# Altium PCB Booster_PA_PREAMP.PcbDoc (part 1 of 2)
Units mil, origin at the board's own origin, x right, y up, seen from the top; angles counter-clockwise.
Board outline 3139.79 x 1141.76 mil, 2 copper layers (Top Layer, Bottom Layer), stack 42.17 mil thick; 86 components, 52 nets, 234 pads, 243 vias.
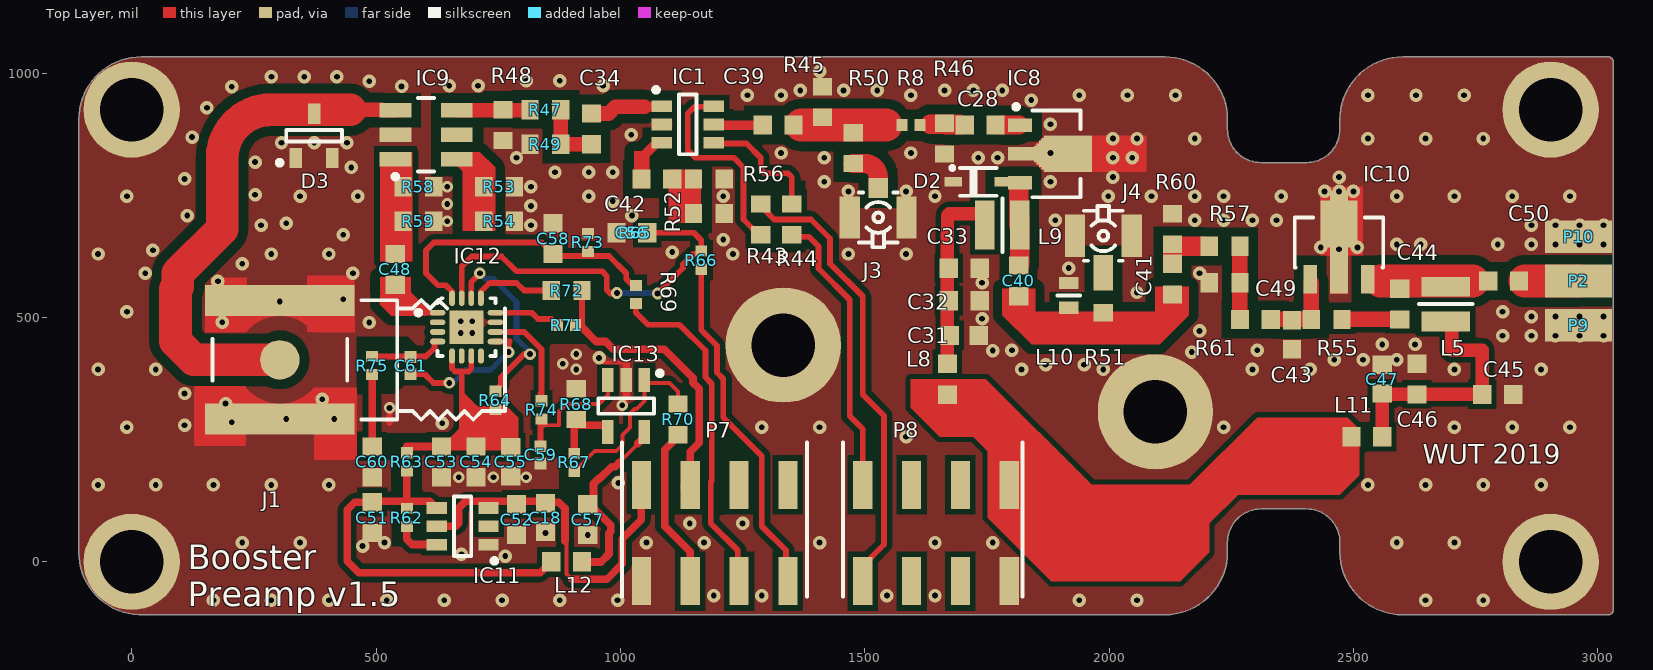
[diagram p0: Top Layer view]
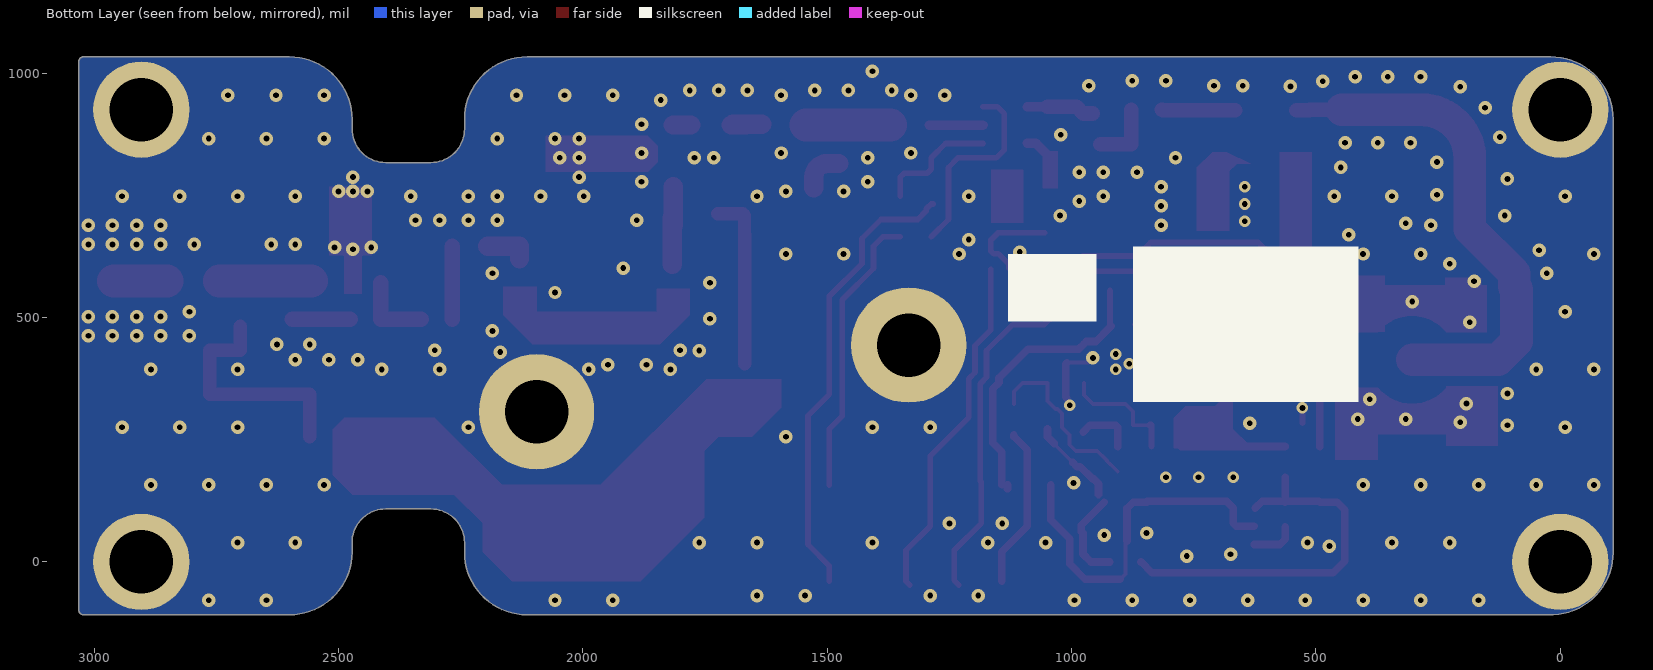
[diagram p1: Bottom Layer view, seen from below]
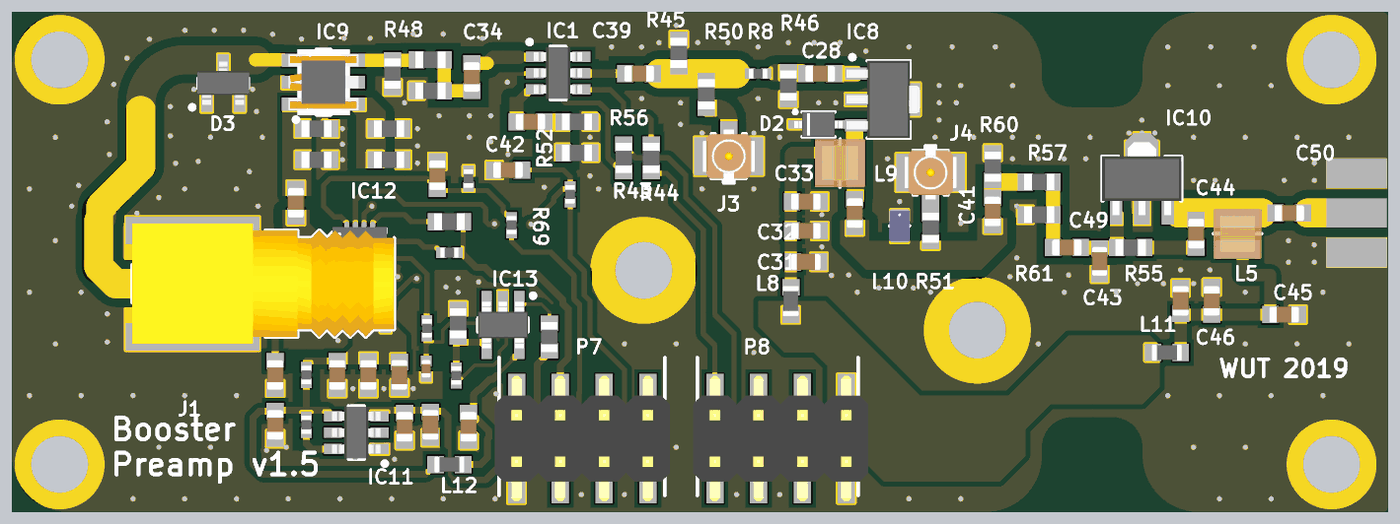
[diagram p2: 3D render of the assembled board from above, using the file's embedded part models]

## Layer stack, top to bottom
Top Solder: solder mask 0.4, Solder Resist, Dk 3.5
Top Layer: signal copper 1.4
Dielectric 1: dielectric 39.3701, FR408, Dk 3.67
Bottom Layer: signal copper 1.4
Bottom Solder: solder mask 0.4, Solder Resist, Dk 3.5

## Board outline
14.24,-108.17 ccw(c15.75,-98.43) 15.75,-108.28 2114.17,-108.28 ccw(c2114.17,19.68) 2242.14,19.68 2242.14,39.37 ccw(c2232.28,39.37) 2242.14,39.41 cw(c2311.02,39.37) 2311.02,108.25 2403.54,108.25 cw(c2403.54,39.37) 2472.43,39.37 2472.43,19.68 cw(c2482.28,19.68) 2472.43,19.73 2472.43,19.68 ccw(c2600.39,19.68) 2600.39,-108.28 2903.54,-108.28 ccw(c2903.54,-98.43) 2903.59,-108.28 3021.65,-108.28 ccw(c3021.65,-98.43) 3031.51,-98.43 3031.51,1023.62 ccw(c3021.65,1023.62) 3021.65,1033.48 2600.39,1033.48 ccw(c2600.39,905.51) 2472.43,905.51 ccw(c2482.28,905.51) 2472.43,905.47 2472.43,885.83 cw(c2403.54,885.83) 2403.54,816.94 2311.02,816.94 cw(c2311.02,885.83) 2242.14,885.79 ccw(c2232.28,885.83) 2242.14,885.83 2242.14,905.51 ccw(c2114.17,905.51) 2114.17,1033.48 19.68,1033.48 ccw(c19.68,905.51) -108.28,905.51 -108.28,19.68 ccw(c19.68,19.68)

## Design rules (kind name [scope] priority, off if disabled: settings)
AcuteAngle [All] p1: minimum=6.00000000000000E+0001 checktracksonly=FALSE
Clearance Clearance_50_Ohm [InNetClass('50_Ohm') vs InNet('GND')] p1: gap=19.68 ignorepadtopadclearanceinfootprint=FALSE except(6: Arc-SMDPad Track-SMDPad SMDPad-SMDPad)
Clearance [All] p2: gap=6 ignorepadtopadclearanceinfootprint=FALSE except(11: Arc-Poly Track-Poly SMDPad-Poly THPad-Poly Via-Poly Fill-Fill Fill-Poly Fill-Region Fill-Text Fill-Hole Poly-Poly Poly-Region Poly-Text Poly-Hole Region-Region Region-Text Region-Hole)
HoleSize [All] p1: absolutevalues=TRUE maxlimit=200 minlimit=5 maxpercent=80.000 minpercent=20.000
MinimumSolderMaskSliver [All] p1: minsoldermaskwidth=3.94
PolygonConnect [All] p1: connectstyle=Direct reliefconductorwidth=10 reliefentries=4 polygonreliefangle="90 Angle" airgapwidth=10
RoomDefinition Booster_PA_PREAMP [InComponentClass('Booster_PA_PREAMP')] p1 off: confinementstyle=ConfineIn formatcopy=TRUE lockcomponents=FALSE outline 2495.67,1003.94 252.55,1003.94 252.55,-23.62 2495.67,-23.62
RoutingVias [All] p1: holewidth=28 width=50 viastyle="Through Hole" minholewidth=28 minwidth=50 maxholewidth=28 maxwidth=50
SolderMaskExpansion [All] p1: expansion=4 istentingtop=FALSE
Width Width_50_Ohm [InNetClass('50_Ohm')] p1: maxlimit=66.93 minlimit=11.81 preferedwidth=66.93 bottomlayer_minwidth=0 bottomlayer_maxwidth=0 bottomlayer_prefwidth=0 minimp=50.000000 maximp=50.000000 favimp=50.000000
Width [All] p2: maxlimit=78.74 minlimit=7.87 preferedwidth=19.68 minimp=50.000000 maximp=50.000000 favimp=50.000000
28 further rules are at their usual default settings.

## Classes and differential pairs
net class 50_Ohm: NetC28_1 NetC28_2 NetC34_1 NetC34_2 NetC39_1 NetC39_2 NetC40_1 NetC40_2 NetC41_2 NetC42_1 NetC42_2 NetC43_2 NetC44_2 NetC48_1 NetC49_1 NetC50_2 NetD3_3 NetIC9_4 NetIC9_6 NetJ3_1 NetJ4_1

## Components (designator, comment, footprint, x,y, rotation, side; value= is the part's Value field where it differs from the comment)
C18 "4.7uF" CAPC1709X95N 846.46,90.55 r90 top
C28 "680pF" CAPC1608X87N 1736.22,893.7 r0 top
C31 "4.7uF" CAPC1709X95N 1703.54,463.19 r180 top
C32 "100nF" CAPC1608X87N 1703.54,534.06 r180 top
C33 "680pF" CAPC1608X87N 1703.54,600.98 r180 top
C34 "680pF" CAPC1608X87N 940.94,885.83 r90 top
C39 "680pF" CAPC1608X87N 1322.83,893.7 r0 top
C40 "39pF" CAPC1608X87N 1814.96,574.8 r270 top
C41 "330pF" CAPC1608X87N 2129.92,578.74 r90 top
C42 "680pF" CAPC1608X87N 1074.8,783.46 r180 top
C43 "Undefined" CAPC1608X90N 2374.02,464.57 r90 top
C44 "2.2nF" CAPC1608X87N 2594.49,527.56 r90 top
C45 "680pF" CAPC1608X87N 2795.28,342.52 r180 top
C46 "100nF" CAPC1608X87N 2629.92,374.02 r270 top
C47 "4.7uF" CAPC1709X95N 2559.05,374.02 r270 top
C48 "2.2nF" CAPC1608X87N 539.37,598.43 r90 top
C49 "680pF" CAPC1608X87N 2299.21,496.06 r0 top
C50 "680pF" CAPC1608X87N 2807.09,574.8 r0 top
C51 "100nF" CAPC1608X87N 492.13,90.55 r270 top
C52 "100nF" CAPC1608X87N 787.4,86.22 r90 top
C53 "680pF" CAPC1608X87N 633.86,204.72 r90 top
C54 "100nF" CAPC1608X87N 704.72,204.72 r90 top
C55 "4.7uF" CAPC1709X95N 775.59,204.72 r90 top
C56 "47nF" CAPC1608X87N 1023.62,673.23 r180 top
C57 "100nF" CAPC1608X87N 933.35,86.22 r90 top
C58 "100nF" CAPC1608X87N 862.2,661.42 r270 top
C59 "10nF" CAPC1005X55N 836.61,218.9 r90 top
C60 "100nF" CAPC1608X87N 492.13,204.72 r270 top
C61 "1nF" CAPC1005X55N 570.87,401.57 r90 top
D2 "AQ4021-01FTG-C" SOD2513X114N 1732.28,777.56 r0 top
D3 "SZNUP1301ML3T1G" SOT95P240X110-3N 373.45,871.77 r90 top
IC1 "HMC544AE" SOT95P280X145-6N 1137.8,894.94 r0 top
IC8 "ADL5536ARKZ" ANALOG-DEVICES_SOT-89(RK-3) 1892.32,834.65 r0 top
IC9 "TCD-9-1WX+" MINI-CIRCUITS_DB1627 602.36,874.02 r90 top
IC10 "PHA-1+" MINI-CIRCUITS_DF782 2470.47,653.54 r0 top
IC11 "ADP3300ARTZ-3.3-RL7" SOT95P280X145-6N 677.17,72.75 r180 top
IC12 "ADL5904ACPZN-R7" QFN50P300X300X80-17N-S175 685.04,480.31 r0 top locked
IC13 "MCP6291T-E/OT" SOT95P270X145-5N 1011.81,318.9 r270 top
J1 "SMA" LINK_CONSMA002-SMD-G 303.15,413.39 r0 top locked
J3 "U.FL" HIROSE_U.FL-R-SMT-1(10) 1527.56,704.72 r180 top
J4 "U.FL" HIROSE_U.FL-R-SMT-1(10) 1988.19,667.32 r0 top
L5 "1uH" IND_ABRACON_AISC-1008 2688.98,527.56 r90 top
L8 "1000R@100MHz" INDC1608X95N 1669.15,373.62 r90 top
L9 "1uH" IND_ABRACON_AISC-1008 1781.5,688.98 r0 top
L10 "330nH" IND_COILCRAFT_0603LS 1917.32,545.28 r270 top
L11 "1000R@100MHz" INDC1608X95N 2527.56,255.91 r180 top
L12 "1000R@100MHz" INDC1608X95N 889.76,0 r180 top
P2 "PAD" PAD_2x3_rect#1 2960.63,551.18 r90 top value=-
P7 "HDR2X4" HDR2X4_SMD 1192.91,59.06 r90 top value="should be fixed with thermal glue"
P8 "HDR2X4" HDR2X4_SMD 1645.67,59.06 r90 top value="should be fixed with thermal glue"
P9 "PAD" PAD_2x3_rect#2 2960.63,437.01 r90 top value=-
P10 "PAD" PAD_2x3_rect#3 2960.63,614.17 r90 top value=-
R8 "0" RESC1005X40N 1594.49,893.7 r0 top
R43 "100" RESC1608X55N 1287.4,700.79 r90 top
R44 "100" RESC1608X55N 1350.39,700.79 r270 top
R45 "Undefined" RESC1608X55N 1413.39,940.94 r270 top
R46 "Undefined" RESC1608X55N 1663.39,866.14 r90 top
R47 "30" RESC1608X55N 846.46,925.2 r0 top
R48 "180" RESC1608X55N 759.84,893.7 r270 top
R49 "180" RESC1608X55N 846.46,854.33 r180 top
R50 "Undefined" RESC1608X55N 1476.38,846.46 r90 top
R51 "Undefined" RESC1608X55N 1988.19,541.34 r270 top
R52 "100" RESC1608X55N 1181.1,712.6 r180 top
R53 "100" RESC1608X55N 751.97,767.72 r180 top
R54 "100" RESC1608X55N 751.97,696.85 r180 top
R55 "1k" RESC1608X55N 2444.88,496.06 r0 top
R56 "100" RESC1608X55N 1181.1,783.46 r0 top
R57 "42R2" RESC1608X55N 2236.22,645.67 r0 top
R58 "169" RESC1608X55N 586.61,767.72 r180 top
R59 "169" RESC1608X55N 586.61,696.85 r180 top
R60 "130" RESC1608X55N 2129.92,681.1 r90 top
R61 "130" RESC1608X55N 2236.22,570.87 r180 top
R62 "10k" RESC1005X40N 562.99,90.55 r90 top
R63 "0" RESC1005X40N 562.99,204.72 r90 top
R64 "10k" RESC1005X40N 744.09,330.71 r90 top
R65 "0" RESC1005X40N 1030.51,673.23 r0 top
R66 "0" RESC1005X40N 1165.35,617.33 r90 top
R67 "10k" RESC1005X40N 905.51,203.4 r90 top
R68 "20k" RESC1608X55N 909.45,322.83 r270 top
R69 "0" RESC1005X40N 1031.5,547.24 r90 top
R70 "100" RESC1608X55N 1118.11,291.34 r270 top
R71 "0" RESC1005X40N 889.76,484.25 r180 top
R72 "Undefined" RESC1608X55N 889.76,555.12 r0 top
R73 "10k" RESC1005X40N 933.35,653.54 r90 top
R74 "0" RESC1005X40N 838.58,311.02 r90 top
R75 "0" RESC1005X40N 492.13,401.57 r90 top

## Footprints (in the part's own frame and the unit in brackets; to place one, negate y for a bottom-side part, rotate by r counter-clockwise, add the part's x,y. Pads: shape width x height; smd on the part's side, far side on the other; paste and mask are expansions set on the pad)
ANALOG-DEVICES_SOT-89(RK-3) [mm] "SOT89, 1.50mm Pitch; 3-Leads, 2.5mm W X 4.5mm L X 1.6mm H body"
  rect 1.25x0.7 smd: 1(-1.89,1.5) 3(-1.89,-1.5)
  rect 1.35x0.7 smd: 2(-1.84,0)
  rect 0.131x0.131 smd: 2(-0.968,-0.491) 2(-0.968,0.49) 2(-0.706,-0.753) 2(-0.706,0.753)
  rect 0.262x0.262 smd: 2(-0.771,-0.556) 2(-0.771,0.556)
  rect 3x0.85 smd: 2(0.335,0)
  rect 2.475x0.525 smd: 2(0.597,-0.688) 2(0.597,0.687)
  Top Layer region: -1.165,0.425 -0.64,0.95 -0.64,-0.95 -1.165,-0.425
  silkscreen extent -2.22,-2.25 1.24,2.57, body extent -2.44,-2.25 1.81,2.25, height 1.6
CAPC1005X55N [mm] "Capacitor, Non-Polarized, Chip; 1.00mm L X 0.50mm W X 0.70mm H, IPC Medium Density"
  rect 0.62x0.62 smd: 1(-0.45,0) 2(0.45,0)
  body extent -0.52,-0.27 0.53,0.28, height 0.55
CAPC1608X87N [mm] "Chip Capacitor, Body 1.6x0.8mm IPC Medium Density"
  rect 0.95x1 smd: 1(-0.8,0) 2(0.8,0)
  body extent -0.87,-0.47 0.88,0.48, height 0.87
CAPC1608X90N [mm] "Chip Capacitor, Body 1.6x0.8mm IPC Medium Density"
  rect 0.95x0.95 smd: 1(-0.75,0) 2(0.75,0)
  body extent -0.85,-0.45 0.85,0.45, height 0.9
CAPC1709X95N [mm] "Capacitor, non-Polarized, Chip; 1.65mm L X 0.85mm W X 0.95mm H,IPC Medium Density"
  rect 0.95x1 smd: 1(-0.75,0) 2(0.75,0)
  body extent -0.87,-0.47 0.88,0.48, height 0.95
HDR2X4_SMD [mm]
  rect 2.5x1 smd: 1(-2.5,-3.81) 2(2.5,-3.81) 3(-2.5,-1.27) 4(2.5,-1.27) 5(-2.5,1.27) 6(2.5,1.27) 7(-2.5,3.81) 8(2.5,3.81)
  silkscreen extent -3.3,-4.79 4.7,4.83, body extent -3.65,-5.08 3.65,5.08, height 9.3
HIROSE_U.FL-R-SMT-1(10) [mm] "Up to 6GHz Ultra Small Surface Mount Male Coaxial Connectors U.FL Series"
  rect 1x1.05 smd: 1(0,-1.525)
  rect 1.05x2.2 smd: 2(-1.475,0) 2(1.475,0)
  silkscreen extent -1,-1.3 1,1.55, body extent -1.5,-1.55 1.5,1.55, height 1.25
IND_ABRACON_AISC-1008 [mm] "Inductor, Molded Body; 2.92mm L X 2.79mm W, AISC-1008 Series"
  rect 1.02x2.54 smd: 1(-0.905,0) 2(0.905,0)
  silkscreen extent 0,-1.4 0,1.4, body extent -1.46,-1.39 1.46,1.4, height 2.29
IND_COILCRAFT_0603LS [mm] "SMD Inductor  Body Width 1.27mm Body Lenght 1.8mm Height 1.12mm, 0603LS Series"
  rect 0.64x1.02 smd: 1(-0.64,0) 2(0.64,0)
  silkscreen extent 0,-0.58 0,0.58, body extent -0.9,-0.58 0.9,0.58, height 1.12
INDC1608X95N [mm] "Chip Inductor, 2-Leads, EIA 0603, Metric 1608, Body 1.6x0.8mm, IPC Medium Density"
  rect 0.95x1 smd: 1(-0.8,0) 2(0.8,0)
  body extent -0.87,-0.47 0.88,0.48, height 0.95
LINK_CONSMA002-SMD-G [mm] "SSMA Female Right Angled - Surface Mount"
  round 2.05 smd: 1(0,0)
  rect 7.76x1.6 smd: 2(0,-3.08) 2(0,3.08)
  Top Layer region: -3.88,1.44 -3.88,3.88 3.88,3.88 3.88,1.44 1.768,1.44 0.979,2.059 0,2.28 -0.979,2.059 -1.768,1.44 -1.768,1.44
  Top Layer region: 3.88,-1.44 3.88,-3.88 -3.88,-3.88 -3.88,-1.44 -1.768,-1.44 -0.979,-2.059 0,-2.28 0.979,-2.059 1.768,-1.44 1.768,-1.44
  silkscreen extent -3.5,-3.12 11.7,3.12, body extent -3.5,-3.5 11.7,3.5, height 10.8
MINI-CIRCUITS_DB1627 [mm] "MINI-CIRCUITS Case Style DB1627 - Body 4.06X3.81mm"
  rect 0.76x1.65 smd: 1(-1.27,1.59) 2(0,1.59) 3(1.27,1.59) 4(1.27,-1.59) 5(0,-1.59) 6(-1.27,-1.59)
  silkscreen extent -2.3,-0.42 1.91,1.72, body extent -1.9,-2.03 1.91,2.03, height 4.06
MINI-CIRCUITS_DF782 [mm] "MINI-CIRCUITS DF782 Case, 1.50mm pitch; 4 pin, 2.44mm W X 4.49mm L"
  rect 0.71x1.5 smd: 1(-1.5,-1.915) 3(1.5,-1.915)
  rect 0.917x2.41 smd: 2(0,-1.46)
  rect 1.905x2.427 smd: 4(0,0.958)
  rect 0.92x0.493 smd: 4(0,2.418)
  Top Layer region: -0.457,-0.751 -0.953,-0.255 -0.953,2.172 -0.46,2.665 0.46,2.665 0.953,2.172 0.953,-0.255 0.457,-0.751 0.457,-2.665 -0.457,-2.665
  silkscreen extent -2.3,-1.3 2.3,1.3, body extent -2.3,-2.12 2.3,2.12, height 1.6
PAD_2x3_rect#1 [mm] "pad pod gniazdka SMA wkrêcane w obudowy"
  rect 1.7x3.5 smd mask+0.03: 1(0.6,0)
PAD_2x3_rect#2 [mm] "pad pod gniazdka SMA wkrêcane w obudowy"
  rect 1.7x3.5 smd mask+0.03: 1(1.2,0)
PAD_2x3_rect#3 [mm] "pad pod gniazdka SMA wkrêcane w obudowy"
  rect 1.7x3.5 smd mask+0.03: 1(1.3,0)
QFN50P300X300X80-17N-S175 [mm] "QFN, 0.50mm Pitch, Square; 16 Pin, 3.00mm L X 3.00mm W X 0.80mm H Body (w/Thermal Tab 1.75 X 1.75mm),  IPC Medium Density"
  oval 0.8x0.3 smd: 1(-1.5,0.75) 2(-1.5,0.25) 3(-1.5,-0.25) 4(-1.5,-0.75) 9(1.5,-0.75) 10(1.5,-0.25) 11(1.5,0.25) 12(1.5,0.75)
  oval 0.3x0.8 smd: 5(-0.75,-1.5) 6(-0.25,-1.5) 7(0.25,-1.5) 8(0.75,-1.5) 13(0.75,1.5) 14(0.25,1.5) 15(-0.25,1.5) 16(-0.75,1.5)
  rect 1.75x1.75 smd: 17(0,0)
  silkscreen extent -2.62,-1.5 1.5,1.5, body extent -1.57,-1.57 1.58,1.58, height 0.8
RESC1005X40N [mm] "Chip Resistor, EIA 0402, Metric 1005, Body 1.0x0.5mm, IPC Medium Density"
  rect 0.58x0.62 smd: 1(-0.47,0) 2(0.47,0)
  body extent -0.52,-0.27 0.53,0.28, height 0.4
RESC1608X55N [mm] "Chip Resistor, EIA 0603, Metric 1608, Body 1.6x0.8mm, IPC Medium Density"
  rect 0.9x1 smd: 1(-0.8,0) 2(0.8,0)
  body extent -0.87,-0.47 0.88,0.48, height 0.55
SOD2513X114N [mm] "SOD-323 Diode; 1.75mm W X 1.30mm L X 1.14mm H Body, IPC Medium Density"
  rect 0.9x0.5 smd: 1(-1.3,0) 2(1.3,0)
  silkscreen extent -1.45,-0.72 0.95,0.82, body extent -1.4,-0.72 1.4,0.73, height 1.15
SOT95P240X110-3N [mm] "SOT23 3-Leads, Pitch 0.95mm, Body 1.3x2.9mm, IPC Medium Density"
  rect 1.05x0.65 smd: 1(-1.15,0.95) 2(-1.15,-0.95) 3(1.15,0)
  silkscreen extent -1.52,-1.45 0.3,1.92, body extent -1.25,-1.5 1.25,1.5, height 1.1
SOT95P270X145-5N [mm] "SOT, 0.95mm Pitch; 5 Pin,1.55mm W X 2.90mm L X 1.45mm H body, IPC Medium Density"
  rect 1.25x0.6 smd: 1(-1.35,0.95) 2(-1.35,0) 3(-1.35,-0.95) 4(1.35,-0.95) 5(1.35,0.95)
  silkscreen extent -1.82,-1.45 0.4,1.88, body extent -1.35,-1.45 1.35,1.45, height 1.45
SOT95P280X145-6N [mm] "SOT23, 6-Leads, Body 1.6x3.0mm, Pitch 0.95mm, IPC Medium Density"
  rect 1.05x0.6 smd: 1(-1.35,0.95) 2(-1.35,0) 3(-1.35,-0.95) 4(1.35,-0.95) 5(1.35,0) 6(1.35,0.95)
  silkscreen extent -1.77,-1.55 0.45,1.92, body extent -1.4,-1.5 1.4,1.5, height 1.45

## Part data
C18 C31 C47 C55: library part CC0603_4.7UF_16V_10%_X5R, "Non-polarised capacitor", Case=0603, Manufacturer=GENERIC, Manufacturer1 ComponentHeight=0.95mm, Manufacturer1 Example="TAIYO YUDEN", Manufacturer1 Part Number=EMK107ABJ475KA-T, Tolerance=±10%, Voltage=16V, Author="CERN DEM JLC", Component Type=Standard, CreateDate=16.12.2013, HelpURL=\\cern.ch\dfs\Applications\Altium\Datasheets\CC0603_X7R_TAIYO-YUDEN_HIGH-VALUE.pdf, LatestRevisionDate=16.09.2014, Manufacturer Part Number=CC0603_4.7UF_16V_10%_X5R, Mounted=Yes, Part Description="SMD Multilayer Chip Ceramic Capacitor", Part Number=CC0603_4.7UF_16V_10%_X5R, Pin Count=2, Sense=No, SMD=Yes, Socket=No, Status=None, TC=X5R
C28 C33 C34 C39 C42 C45 C49 C50 C53: library part CC0603_680PF_50V_5%_NP0, "Non-polarised capacitor", Case=0603, Manufacturer=GENERIC, Manufacturer1 ComponentHeight=0.87mm, Manufacturer1 Example=PHYCOMP, Manufacturer1 Part Number=223886715681, Tolerance=±5%, Voltage=50V, Author="CERN DEM JLC", Component Type=Standard, CreateDate=03.12.2007, HelpURL=\\cern.ch\dfs\Applications\Altium\Datasheets\CC0603_NP0_PHYCOMP.pdf, LatestRevisionDate=03.12.2007, Manufacturer Part Number=CC0603_680PF_50V_5%_NP0, Mounted=Yes, Part Description="SMD Multilayer Chip Ceramic Capacitor", Part Number=CC0603_680PF_50V_5%_NP0, Pin Count=2, Sense=No, SMD=Yes, Socket=No, Status=Preferred, TC=C0G/NP0
C32 C46 C51 C52 C54 C57 C58 C60: library part CC0603_100NF_50V_10%_X7R, "Non-polarised capacitor", Case=0603, Manufacturer=GENERIC, Manufacturer1 ComponentHeight=0.87mm, Manufacturer1 Example=PHYCOMP, Manufacturer1 Part Number=223858615649, Tolerance=±10%, Voltage=50V, Author="CERN DEM JLC", Component Type=Standard, CreateDate=03.12.2007, HelpURL=\\cern.ch\dfs\Applications\Altium\Datasheets\CC0603_X7R_PHYCOMP.pdf, LatestRevisionDate=03.12.2007, Manufacturer Part Number=CC0603_100NF_50V_10%_X7R, Mounted=Yes, Part Description="SMD Multilayer Chip Ceramic Capacitor", Part Number=CC0603_100NF_50V_10%_X7R, Pin Count=2, Sense=No, SMD=Yes, Socket=No, Status=Preferred, TC=X7R
C40: "Non-polarised capacitor", Case=0603, Manufacturer=GENERIC, Manufacturer1 ComponentHeight=0.87mm, Manufacturer1 Example=AVX, Manufacturer1 Part Number=06031A390FAT2A, Manufacturer Part Number=CC0603_39PF_100V_1%_NP0, Tolerance=±1%, Voltage=100V, Author=GK, Component Type=Standard, CreateDate=03.12.2007, HelpURL=\\cern.ch\dfs\Applications\Altium\Datasheets\CC0603_NP0_PHYCOMP.pdf, LatestRevisionDate=03.12.2007, Mounted=Yes, Part Description="SMD Multilayer Chip Ceramic Capacitor", Part Number=CC0603_39PF_100V_1%_NP0, Pin Count=2, Sense=No, SMD=Yes, Socket=No, Status=Preferred, TC=C0G/NP0
C41: library part CC0603_330PF_50V_1%_NP0, "Non-polarised capacitor", Case=0603, Manufacturer=GENERIC, Manufacturer1 ComponentHeight=0.87mm, Manufacturer1 Example=PHYCOMP, Manufacturer1 Part Number=223886718331, Tolerance=±1%, Voltage=50V, Author="CERN DEM MR", Component Type=Standard, CreateDate=06.09.2017, HelpURL=\\cern.ch\dfs\Applications\Altium\Datasheets\CC0603_NP0_PHYCOMP.pdf, LatestRevisionDate=06.09.2017, Manufacturer Part Number=CC0603_330PF_50V_1%_NP0, Mounted=Yes, Part Description="SMD Multilayer Chip Ceramic Capacitor", Part Number=CC0603_330PF_50V_1%_NP0, Pin Count=2, Sense=No, SMD=Yes, Socket=No, Status=None, TC=C0G/NP0
C43: library part CC0603_NO-VALUE, "Non-polarised capacitor", Case=0603, Manufacturer1 ComponentHeight=0.9mm, Author="CERN DEM MR", Component Type=Standard, CreateDate=22.11.2016, HelpURL=Undefined, LatestRevisionDate=22.11.2016, Manufacturer=Undefined, Manufacturer Part Number=CC0603_NO-VALUE, Mounted=No, Part Description="Reserved Footprint For 0603(1608) Chip Ceramic Capacitor", Part Number=CC0603_NO-VALUE, Pin Count=2, Sense=No, SMD=Yes, Socket=No, Status=None
C44 C48: library part CC0603_2.2NF_50V_5%_C0G, "Non-polarised capacitor", Case=0603, Manufacturer=GENERIC, Manufacturer1 ComponentHeight=0.9mm, Manufacturer1 Example=TDK, Manufacturer1 Part Number=C1608C0G1H222J080AA, Tolerance=±5%, Voltage=50V, Author="CERN DEM JMW", Component Type=Standard, CreateDate=23.06.2014, HelpURL=\\cern.ch\dfs\Applications\Altium\Datasheets\CC0603_C0G_TDK_C.pdf, LatestRevisionDate=23.06.2014, Manufacturer Part Number=CC0603_2.2NF_50V_5%_C0G, Mounted=Yes, Part Description="SMD Multilayer Chip Ceramic Capacitor", Part Number=CC0603_2.2NF_50V_5%_C0G, Pin Count=2, Sense=No, SMD=Yes, Socket=No, Status=Preferred, TC=C0G/NP0
C56: library part CC0603_47NF_25V_10%_X7R, "Non-polarised capacitor", Case=0603, Manufacturer=GENERIC, Manufacturer1 ComponentHeight=0.87mm, Manufacturer1 Example=PHYCOMP, Manufacturer1 Part Number=223891615645, Tolerance=±10%, Voltage=25V, Author="CERN DEM JLC", Component Type=Standard, CreateDate=03/12/2007, HelpURL=\\cern.ch\dfs\Applications\Altium\Datasheets\CC0603_X7R_PHYCOMP.pdf, LatestRevisionDate=03/12/2007, Manufacturer Part Number=CC0603_47NF_25V_10%_X7R, Mounted=Yes, Part Description="SMD Multilayer Chip Ceramic Capacitor", Part Number=CC0603_47NF_25V_10%_X7R, Pin Count=2, Sense=No, SMD=Yes, Socket=No, Status=Preferred, TC=X7R
C59: library part CC0402_10NF_25V_10%_X7R, "Non-polarised capacitor", Case=0402, Manufacturer=GENERIC, Manufacturer1 ComponentHeight=0.55mm, Manufacturer1 Example=TDK, Manufacturer1 Part Number=C1005X7R1E103KT, Tolerance=±10%, Voltage=25V, Author="CERN DEM JLC", Component Type=Standard, CreateDate=25.10.2012, HelpURL=\\cern.ch\dfs\Applications\Altium\Datasheets\CC0402_X7R_TDK_C.pdf, LatestRevisionDate=25.10.2012, Manufacturer Part Number=CC0402_10NF_25V_10%_X7R, Mounted=Yes, Part Description="SMD Multilayer Chip Ceramic Capacitor", Part Number=CC0402_10NF_25V_10%_X7R, Pin Count=2, Sense=No, SMD=Yes, Socket=No, Status=Preferred, TC=X7R
C61: library part CC0402_1NF_50V_10%_X7R, "Non-polarised capacitor", Case=0402, Manufacturer=GENERIC, Manufacturer1 ComponentHeight=0.55mm, Manufacturer1 Example=PHYCOMP, Manufacturer1 Part Number=223858715623, Tolerance=±10%, Voltage=50V, Author="CERN DEM JLC", Component Type=Standard, CreateDate=03.12.2007, HelpURL=\\cern.ch\dfs\Applications\Altium\Datasheets\CC0402_X7R_PHYCOMP.pdf, LatestRevisionDate=03.12.2007, Manufacturer Part Number=CC0402_1NF_50V_10%_X7R, Mounted=Yes, Part Description="SMD Multilayer Chip Ceramic Capacitor", Part Number=CC0402_1NF_50V_10%_X7R, Pin Count=2, Sense=No, SMD=Yes, Socket=No, Status="Not Recommended", TC=X7R
D2: "6V Bi-directional,ESD Protection for Transient Voltage Suppressor Diode", Case=SOD323, Manufacturer=Littlefuse, Power=450W, Voltage=6V, Author=GK, Bonding=No, Component Type=Standard, ComponentHeight=1.14mm, CreateDate=22.07.2015, Device=AQ4021-01FTG-C, HelpURL=\\cern.ch\dfs\Applications\Altium\Datasheets\CDSOD323-T12C-DSL.pdf, LatestRevisionDate=19.12.2017, Manufacturer Part Number=AQ4021-01FTG-C, Mounted=Yes, PackageDescription="SOD-323 Diode; 1.75mm W X 1.30mm L X 1.14mm H Body, IPC Medium Density", Part Description="Bi-directional ESD Protection for Transient Voltage Suppressor Diode", Part Number=AQ4021-01FTG-C, Pin Count=2, PressFit=No, Sense=No, SMD=Yes, Socket=No
D3: "Low Capacitance Diode Array for ESD Protection in a Single Data Line", Case=SOT23, Manufacturer=ONSEMI, Power=215mA, Voltage=70V, Author=GK, Bonding=No, Component Type=Standard, ComponentHeight=1.1mm, CreateDate=18.01.2010, Device=SZNUP1301ML3T1G, HelpURL=\\cern.ch\dfs\Applications\Altium\Datasheets\BAR66.pdf, LatestRevisionDate=05.10.2010, Manufacturer Part Number=SZNUP1301ML3T1G, Mounted=Yes, PackageDescription="SOT23 3-Leads, Pitch 0.95mm - Body 1.3x2.9mm, IPC Medium Density", Part Description="Low Capacitance Diode Array for ESD Protection in a Single Data Line", Part Number=SZNUP1301ML3T1G, Pin Count=3, PressFit=No, Sense=No, SMD=Yes, Socket=No
IC1: "GaAs MMIC T/R Switch DC - 4 GHz", Case=SOT23-6, Manufacturer="ANALOG DEVICES", Author="CERN DEM MR", Bonding=No, ComponentHeight=1.45mm, Component Type=Standard, CreateDate=26.09.2017, Device=HMC544AE, HelpURL=\\cern.ch\dfs\Applications\Altium\Datasheets\HMC544AE.pdf, LatestRevisionDate=26.09.2017, Manufacturer Part Number=HMC544AE, Mounted=Yes, PackageDescription="SOT23, 6-Leads, Body 1.6x3.0mm, Pitch 0.95mm, IPC Medium Density", Part Description="GaAs MMIC T/R Switch DC - 4 GHz", Part Number=HMC544AE, Pin Count=6, PressFit=No, Sense=No, SMD=Yes, Socket=No
IC8: "20MHz to 1GHz IF Gain Block", Case=SOT89, Manufacturer="ANALOG DEVICES", Author="CERN DEM BC", Bonding=No, ComponentHeight=1.6mm, Component Type=Standard, CreateDate=19.08.2019, Device=ADL5536ARKZ, HelpURL=\\cern.ch\dfs\Applications\Altium\Datasheets\ADL5536ARKZ.pdf, LatestRevisionDate=19.08.2019, Manufacturer Part Number=ADL5536ARKZ, Mounted=Yes, PackageDescription="SOT89, 1.50mm Pitch; 3-Leads, 2.5mm W X 4.5mm L X 1.6mm H body", Part Description="20MHz to 1GHz IF Gain Block", Part Number=ADL5536ARKZ, Pin Count=4, PressFit=No, Sense=No, SMD=Yes, Socket=No
IC9: "50 Ohm, 5 To 2000MHz, Directional Coupler", Manufacturer=MINI-CIRCUITS, Author="CERN DEM BC", Bonding=No, ComponentHeight=4.06mm, Component Type=Standard, CreateDate=22.08.2019, Device=TCD-9-1WX+, HelpURL=\\cern.ch\dfs\Applications\Altium\Datasheets\TCD-9-1WX+.pdf, LatestRevisionDate=22.08.2019, Manufacturer Part Number=TCD-9-1WX+, Mounted=Yes, PackageDescription="MINI-CIRCUITS Case Style DB1627 - Body 4.06X3.81mm", Part Description="50 Ohms, 5 To 2000MHz, Directional Coupler", Part Number=TCD-9-1WX+, Pin Count=6, PressFit=No, Sense=No, SMD=Yes, Socket=No
IC10: "Monolithic Amplifier", Manufacturer=MINI-CIRCUITS, Author="CERN DEM BC", Bonding=No, ComponentHeight=1.6mm, Component Type=Standard, CreateDate=22.08.2019, Device=PHA-1+, HelpURL=\\cern.ch\dfs\Applications\Altium\Datasheets\PHA-1+.pdf, LatestRevisionDate=22.08.2019, Manufacturer Part Number=PHA-1+, Mounted=Yes, PackageDescription="MINI-CIRCUITS DF782 Case, 1.50mm pitch; 4 pin, 2.44mm W X 4.49mm L", Part Description="0.05-6GHz Surface Mount Monolithic Amplifier", Part Number=PHA-1+, Pin Count=4, PressFit=No, Sense=No, SMD=Yes, Socket=No
IC11: "High Accuracy anyCAP® 50 mA Low Dropout Linear Regulator", Case=SOT23-6, Manufacturer="ANALOG DEVICES", Author="CERN DEM JLC", Bonding=No, ComponentHeight=1.45mm, Component Type=Standard, CreateDate=30.11.2011, Device=ADP3300ARTZ-3.3-RL7, HelpURL=\\cern.ch\dfs\Applications\Altium\Datasheets\ADP3300ARTZ-3.3-RL7.pdf, LatestRevisionDate=30.11.2011, Manufacturer Part Number=ADP3300ARTZ-3.3-RL7, Mounted=Yes, PackageDescription="SOT23, 0.95mm pitch; 6 pin, 1.6mm W X 2.9mm L X 1.45mm H body, IPC Medium Density", Part Description="3.3V High Accuracy anyCAP® 50 Ma Low Dropout Linear Regulator", Part Number=ADP3300ARTZ-3.3-RL7, Pin Count=6, PressFit=No, Sense=No, SMD=Yes, Socket=No
IC12: "DC to 6 GHz, 45 dB TruPwr Detector With Envelope Threshold Detection", Case=QFN16, Manufacturer="ANALOG DEVICES", Author="CERN DEM MR", Bonding=No, ComponentHeight=0.8mm, Component Type=Standard, CreateDate=26.09.2017, Device=ADL5904ACPZN-R7, HelpURL=\\cern.ch\dfs\Applications\Altium\Datasheets\ADL5904ACPZN-R7.pdf, LatestRevisionDate=26.09.2017, Manufacturer Part Number=ADL5904ACPZN-R7, Mounted=Yes, PackageDescription="QFN, 0.50mm Pitch, Square; 16 Pin, 3.00mm L X 3.00mm W X 0.80mm H Body (w/Thermal Tab 1.75 X 1.75mm),  IPC Medium Density", Part Description="DC to 6 GHz, 45 dB TruPwr Detector With Envelope Threshold Detection", Part Number=ADL5904ACPZN-R7, Pin Count=17, PressFit=No, Sense=No, SMD=Yes, Socket=No
IC13: "Operational Amplifier", Case=SOT23-5, Manufacturer="MICROCHIP TECHNOLOGY", Author="CERN DEM BC", Bonding=No, ComponentHeight=1.45mm, Component Type=Standard, CreateDate=22.08.2019, Device=MCP6291T-E/OT, HelpURL=\\cern.ch\dfs\Applications\Altium\Datasheets\MCP6291T-E-OT.pdf, LatestRevisionDate=22.08.2019, Manufacturer Part Number=MCP6291T-E/OT, Mounted=Yes, PackageDescription="SOT, 0.95mm pitch; 5 pin, 1.55mm W X 2.90mm L X 1.45mm H body, IPC Medium Density", Part Description="1.0mA, 10 MHz Rail-to-Rail Operational Amplifier", Part Number=MCP6291T-E/OT, Pin Count=5, PressFit=No, Sense=No, SMD=Yes, Socket=No
J1: library part LINK_CONSMA002-SMD-G, Manufacturer="LINK TECHNOLOGIES", Manufacturer Part Number=CONSMA002-SMD-G, Author="CERN DEM BC", ComponentHeight=10.8mm, Component Type=Standard, CreateDate=28.08.2019, Family=SMA, HelpURL=\\cern.ch\dfs\Applications\Altium\Datasheets\LINK_CONSMA002-SMD-G.pdf, LatestRevisionDate=28.08.2019, Mounted=Yes, Part Description="SMA Female Right Angled - Surface Mount", Part Number=LINK_CONSMA002-SMD-G, Pin Count=2, PressFit=No, Sense=No, SMD=Yes, Socket=No, Status=None
J3 J4: library part HIROSE_U.FL-R-SMT-1(10), Manufacturer="HIROSE (HRS)", Manufacturer Part Number=U.FL-R-SMT-1(10), Author="CERN DEM JLC", ComponentHeight=1.25mm, Component Type=Standard, CreateDate=24.03.2010, Family=U.FL, HelpURL=\\cern.ch\dfs\Applications\Altium\Datasheets\HIROSE_U.FL-R-SMT-1(10).pdf, LatestRevisionDate=24.03.2010, Mounted=Yes, Part Description="Up to 6GHz Ultra Small Surface Mount Male Coaxial Connectors U.FL Series", Part Number=HIROSE_U.FL-R-SMT-1(10), Pin Count=2, PressFit=No, Sense=No, SMD=Yes, Socket=No, Status=None
L5 L9: library part IND_1UH_2%_ABRACON_AISC-1008, "Inductor", Case=1008, Manufacturer=ABRACON, Manufacturer Part Number=AISC-1008-1R0G, Power=370mA, Resistance=1.8R, Tolerance=±2%, Author="CERN DEM BC", ComponentHeight=2.29mm, Component Type=Standard, CreateDate=26.08.2019, HelpURL=\\cern.ch\dfs\Applications\Altium\Datasheets\IND_ABRACON_AISC-1008.pdf, LatestRevisionDate=26.08.2019, Mounted=Yes, Part Description="SMD Ceramic Wire-Wound Chip Inductor", Part Number=IND_1UH_2%_ABRACON_AISC-1008, Pin Count=2, Sense=No, SMD=Yes, Socket=No, Status=None
L8 L11 L12: library part IND0603_MURATA_BLM18HE102SN1, Case=0603, Manufacturer=MURATA, Manufacturer Part Number=BLM18HE102SN1, Power=600mA, Resistance=0.35R, Tolerance=±25%, Author="CERN DEM JLC", ComponentHeight=0.95mm, Component Type=Standard, CreateDate=09.12.2013, HelpURL=\\cern.ch\dfs\Applications\Altium\Datasheets\IND0603_MURATA_BLM18H.pdf, LatestRevisionDate=25.10.2018, Mounted=Yes, Part Description="SMD EMIFIL Suppression Chip Ferrite Bead", Part Number=IND0603_MURATA_BLM18HE102SN1, Pin Count=2, Sense=No, SMD=Yes, Socket=No, Status=None
L10: library part IND_330NH_2%_COILCRAFT_0603LS, "Inductor With Core", Case=0603, Manufacturer=COILCRAFT, Manufacturer Part Number=0603LS-331XGL, Power=560mA, Resistance=0R46, Tolerance=±2%, Author="CERN DEM BC", ComponentHeight=1.12mm, Component Type=Standard, CreateDate=29.08.2019, HelpURL=\\cern.ch\dfs\Applications\Altium\Datasheets\IND_COILCRAFT_0603LS.pdf, LatestRevisionDate=29.08.2019, Mounted=Yes, Part Description="SMT Chip Inductor", Part Number=IND_330NH_2%_COILCRAFT_0603LS, Pin Count=2, Sense=No, SMD=Yes, Socket=No, Status=None
P2 P9 P10: Manufacturer=-, Generic=no, Manufacturer Part Number=-, Mounting type=-, Package=-, Remarks="PCB PAD", Supplier 1=-, Supplier 2=-, Supplier 3=-, Supplier Part Number 1=-, Supplier Part Number 2=-, Supplier Part Number 3=-
P7 P8: "Header, 4-Pin, Dual Row", Manufacturer=-, Package="2x4 pin SMD", Supplier Part Number 1=ZL264-8DG, Generic=yes, Manufacturer Part Number=-, Mounting type=SMT, Remarks="ordinary goldpin socket", Supplier 1=TME, Supplier 2=-, Supplier 3=-, Supplier Part Number 2=-, Supplier Part Number 3=-
R8 R63 R65 R66 R69 R71 R74 R75: library part R0402_0R_JUMPER, "Resistor", Case=0402, Manufacturer=GENERIC, Manufacturer1 ComponentHeight=0.4mm, Manufacturer1 Example="YAGEO PHYCOMP", Manufacturer1 Part Number=232270591001L, Author="CERN DEM JLC", Component Type=Standard, CreateDate=03.12.2007, HelpURL=\\cern.ch\dfs\Applications\Altium\Datasheets\R0402_Phycomp_RC0402.pdf, LatestRevisionDate=17.10.2012, Manufacturer Part Number=R0402_0R_JUMPER, Mounted=Yes, Part Description="1A (0.05R Max DC Resistance) Zero Ohm Jumper", Part Number=R0402_0R_JUMPER, Pin Count=2, PressFit=No, Sense=No, SMD=Yes, Socket=No, Status="Not Recommended"
R43 R44 R52 R53 R54 R56 R70: library part R0603_100R_1%_0.1W_100PPM, "Resistor - 1%", Case=0603, Manufacturer=GENERIC, Manufacturer1 ComponentHeight=0.55mm, Manufacturer1 Example="NIC COMPONENT", Manufacturer1 Part Number=NRC06F4700TRF, Power=0.1W, Tolerance=±1%, Author="CERN DEM JLC", Component Type=Standard, CreateDate=03.12.2007, HelpURL=\\cern.ch\dfs\Applications\Altium\Datasheets\R0603_NIC_NRC.pdf, LatestRevisionDate=13.03.2008, Manufacturer Part Number=R0603_100R_1%_0.1W_100PPM, Mounted=Yes, Part Description="General Purpose Thick Film Chip Resistor", Part Number=R0603_100R_1%_0.1W_100PPM, Pin Count=2, PressFit=No, Sense=No, SMD=Yes, Socket=No, Status=Preferred, TC=±100ppm/°C
R45 R46 R50 R51 R72: library part R0603_NO-VALUE, "Resistor", Case=0603, Author="CERN DEM JLC", Component Type=Standard, CreateDate=03.12.2007, HelpURL=Undefined, LatestRevisionDate=13.03.2008, Manufacturer=Undefined, Manufacturer1 ComponentHeight=Undefined, Manufacturer1 Example=Undefined, Manufacturer1 Part Number=Undefined, Manufacturer Part Number=R0603_NO-VALUE, Mounted=No, Part Description="Reserved Footprint For a 0603 (1608) Chip Resistor", Part Number=R0603_NO-VALUE, Pin Count=2, PressFit=No, Sense=No, SMD=Yes, Socket=No, Status=None
R47: library part R0603_30R_1%_0.1W_100PPM, "Resistor - 1%", Case=0603, Manufacturer=GENERIC, Manufacturer1 ComponentHeight=0.55mm, Manufacturer1 Example="NIC COMPONENT", Manufacturer1 Part Number=NRC06F30R0TRF, Power=0.1W, Tolerance=±1%, Author="CERN DEM JLC", Component Type=Standard, CreateDate=03.12.2007, HelpURL=\\cern.ch\dfs\Applications\Altium\Datasheets\R0603_NIC_NRC.pdf, LatestRevisionDate=13.03.2008, Manufacturer Part Number=R0603_30R_1%_0.1W_100PPM, Mounted=Yes, Part Description="General Purpose Thick Film Chip Resistor", Part Number=R0603_30R_1%_0.1W_100PPM, Pin Count=2, PressFit=No, Sense=No, SMD=Yes, Socket=No, Status=Preferred, TC=±100ppm/°C
R48 R49: library part R0603_180R_1%_0.1W_100PPM, "Resistor - 1%", Case=0603, Manufacturer=GENERIC, Manufacturer1 ComponentHeight=0.55mm, Manufacturer1 Example="NIC COMPONENT", Manufacturer1 Part Number=NRC06F1800TRF, Power=0.1W, Tolerance=±1%, Author="CERN DEM JLC", Component Type=Standard, CreateDate=03.12.2007, HelpURL=\\cern.ch\dfs\Applications\Altium\Datasheets\R0603_NIC_NRC.pdf, LatestRevisionDate=13.03.2008, Manufacturer Part Number=R0603_180R_1%_0.1W_100PPM, Mounted=Yes, Part Description="General Purpose Thick Film Chip Resistor", Part Number=R0603_180R_1%_0.1W_100PPM, Pin Count=2, PressFit=No, Sense=No, SMD=Yes, Socket=No, Status=Preferred, TC=±100ppm/°C
R55: library part R0603_1K_1%_0.1W_100PPM, "Resistor - 1%", Case=0603, Manufacturer=GENERIC, Manufacturer1 ComponentHeight=0.55mm, Manufacturer1 Example="NIC COMPONENT", Manufacturer1 Part Number=NRC06F1001TRF, Power=0.1W, Tolerance=±1%, Author="CERN DEM JLC", Component Type=Standard, CreateDate=03.12.2007, HelpURL=\\cern.ch\dfs\Applications\Altium\Datasheets\R0603_NIC_NRC.pdf, LatestRevisionDate=13.03.2008, Manufacturer Part Number=R0603_1K_1%_0.1W_100PPM, Mounted=Yes, Part Description="General Purpose Thick Film Chip Resistor", Part Number=R0603_1K_1%_0.1W_100PPM, Pin Count=2, PressFit=No, Sense=No, SMD=Yes, Socket=No, Status=Preferred, TC=±100ppm/°C
R57: library part R0603_42R2_0.1%_0.063W_10PPM, "Resistor - 0.1%", Case=0603, Manufacturer=GENERIC, Manufacturer1 ComponentHeight=0.5mm, Manufacturer1 Example="TYCO HOLSWORTHY", Manufacturer1 Part Number=RN73C1J42R2BTDF, Power=0.063W, Tolerance=±0.1%, Author="CERN DEM JLC", Component Type=Standard, CreateDate=03.12.2007, HelpURL=\\cern.ch\dfs\Applications\Altium\Datasheets\R0603_Tyco_RN73.pdf, LatestRevisionDate=13.03.2008, Manufacturer Part Number=R0603_42R2_0.1%_0.063W_10PPM, Mounted=Yes, Part Description="Thin Film Chip Resistor", Part Number=R0603_42R2_0.1%_0.063W_10PPM, Pin Count=2, PressFit=No, Sense=No, SMD=Yes, Socket=No, Status="Not Recommended", TC=±10ppm
R58 R59: library part R0603_169R_0.1%_0.063W_10PPM, "Resistor - 0.1%", Case=0603, Manufacturer=GENERIC, Manufacturer1 ComponentHeight=0.5mm, Manufacturer1 Example="TYCO HOLSWORTHY", Manufacturer1 Part Number=RN73C1J169RBTDF, Power=0.063W, Tolerance=±0.1%, Author="CERN DEM JLC", Component Type=Standard, CreateDate=03.12.2007, HelpURL=\\cern.ch\dfs\Applications\Altium\Datasheets\R0603_Tyco_RN73.pdf, LatestRevisionDate=13.03.2008, Manufacturer Part Number=R0603_169R_0.1%_0.063W_10PPM, Mounted=Yes, Part Description="Thin Film Chip Resistor", Part Number=R0603_169R_0.1%_0.063W_10PPM, Pin Count=2, PressFit=No, Sense=No, SMD=Yes, Socket=No, Status="Not Recommended", TC=±10ppm
R60 R61: library part R0603_130R_1%_0.1W_100PPM, "Resistor - 1%", Case=0603, Manufacturer=GENERIC, Manufacturer1 ComponentHeight=0.55mm, Manufacturer1 Example="NIC COMPONENT", Manufacturer1 Part Number=NRC06F1300TRF, Power=0.1W, Tolerance=±1%, Author="CERN DEM JLC", Component Type=Standard, CreateDate=03.12.2007, HelpURL=\\cern.ch\dfs\Applications\Altium\Datasheets\R0603_NIC_NRC.pdf, LatestRevisionDate=13.03.2008, Manufacturer Part Number=R0603_130R_1%_0.1W_100PPM, Mounted=Yes, Part Description="General Purpose Thick Film Chip Resistor", Part Number=R0603_130R_1%_0.1W_100PPM, Pin Count=2, PressFit=No, Sense=No, SMD=Yes, Socket=No, Status=Preferred, TC=±100ppm/°C
R62 R64 R67 R73: library part R0402_10k_1%_0.0625W_100PPM, "Resistor - 1%", Case=0402, Manufacturer=GENERIC, Manufacturer1 ComponentHeight=0.4mm, Manufacturer1 Example="YAGEO PHYCOMP", Manufacturer1 Part Number=232270671003L, Manufacturer Part Number=R0402_10K_1%_0.0625W_100PPM, Power=0.0625W, Tolerance=±1%, Author="CERN DEM JLC", Component Type=Standard, CreateDate=03.12.2007, HelpURL=\\cern.ch\dfs\Applications\Altium\Datasheets\R0402_Phycomp_RC0402.pdf, LatestRevisionDate=17.10.2012, Mounted=Yes, Part Description="General Purpose Thick Film Chip Resistor", Part Number=R0402_10K_1%_0.0625W_100PPM, Pin Count=2, PressFit=No, Sense=No, SMD=Yes, Socket=No, Status="Not Recommended", TC=±100ppm/°C
R68: library part R0603_20K_1%_0.1W_100PPM, "Resistor - 1%", Case=0603, Manufacturer=GENERIC, Manufacturer1 ComponentHeight=0.55mm, Manufacturer1 Example="NIC COMPONENT", Manufacturer1 Part Number=NRC06F2002TRF, Power=0.1W, Tolerance=±1%, Author="CERN DEM JLC", Component Type=Standard, CreateDate=03.12.2007, HelpURL=\\cern.ch\dfs\Applications\Altium\Datasheets\R0603_NIC_NRC.pdf, LatestRevisionDate=13.03.2008, Manufacturer Part Number=R0603_20K_1%_0.1W_100PPM, Mounted=Yes, Part Description="General Purpose Thick Film Chip Resistor", Part Number=R0603_20K_1%_0.1W_100PPM, Pin Count=2, PressFit=No, Sense=No, SMD=Yes, Socket=No, Status=Preferred, TC=±100ppm/°C

## Free pads (board coordinates)
  round 196.85 hole 129.92: 0(0,0) 1(0,925.2) 2(2903.54,0) 3(2903.54,925.2)
  round 236.22 hole 129.92: 4(1333.46,443.7) 5(2094.88,307.09)

## Via types
v1: diameter 27.56, hole 11.81, Top Layer to Bottom Layer, tented both sides, 222 vias
v2: diameter 23.62, hole 11.81, Top Layer to Bottom Layer, tented both sides, 21 vias

## Nets (pads, with @x,y where several pads share a name; then routed paths per layer and width w, separated by ;. In a path a pad name is that pad's centre, name@x,y a point inside that pad or via, vN(x,y) a via of type N, cw(c..) or ccw(c..) an arc to the next point about the centre after c; other vN are vias at no path point)
ADL_Q: P7.6 R71.1 R72.2 | length 583.7
  Top Layer w11.81: 921.26,484.25 R72.2
  Top Layer w15.75: R71.1@919.29,482.28 950.79,450.79 970.19,450.79 974.41,446.57 985.94,435.04 1089.76,435.04 1148.43,376.38 1148.43,367.06 1161.42,354.06 1161.42,244.09 1142.91,225.59 P7.6 ; P7.6@1131.1,149.61 P7.6@1131.1,157.48
ADL_RST: P7.1 R66.1 | length 720.9
  Top Layer w11.81: R66.1 1165.35,474.41 1197.64,442.13 1197.64,387.44 1210.63,374.45 1210.63,295.28 1289.37,216.54 1289.37,72.83 1338.58,23.62 1338.58,-39.76 P7.1@1331.1,-47.24
ADL_VREF: P7.3 R69.1 | length 705
  Top Layer w11.81: R69.1@1031.5,528.28 1031.5,510.44 1056.7,485.24 1121.06,485.24 1174.02,432.28 1174.02,377.65 1187.01,364.66 1187.01,165.38 1185.04,163.42 1185.04,78.74 1240.16,23.62 1240.16,-38.19 P7.3@1231.1,-47.24
GND: C18.1 C31.1 C32.1 C33.1 C43.1 C45.1 C46.1 C47.1 C51.2 C52.1 C53.1 C54.1 C55.1 C56.2 C57.1 C58.1 C59.1 C60.2 D2.1 D3.1 D3.2 IC1.2 IC8.2 IC9.2 IC10.2 IC10.4 IC11.1 IC12.11 IC12.17 IC13.2 J1.2 J3.2 J4.2 L10.1 P7.7 P8.1 P9.1 P10.1 pad.0 pad.1 pad.2 pad.3 pad.4 pad.5 R45.1 R46.1 R48.2 R49.2 R52.1 R53.1 R54.1 R56.2 R58.1 R59.1 R60.2 R61.2 R65.1 R68.1 R73.2 | length 149.7
  Top Layer w8: 966.11,407.54 1009.78,407.54 1009.84,407.48
  Top Layer w11.81: 527.56,283.46 v2(527.56,314.96)
  Top Layer w15.75: 1009.78,334.65 1011.81,336.68 1011.81,366.14 1011.81,405.51 1009.84,407.48
  other v1: 167.32,-78.74 285.43,-78.74 403.54,-78.74 521.65,-78.74 639.76,-78.74 757.87,-78.74 875.98,-78.74 994.09,-78.74 1938.98,-78.74 2057.09,-78.74 2647.64,-78.74 2765.75,-78.74 1190.94,-68.9 1289.37,-68.9 1545.28,-68.9 1643.7,-68.9 764.45,11.81 674.78,15.75 472.44,32.17 226.38,39.37 344.49,39.37 517.3,39.37 1053.15,39.37 1171.26,39.37 1407.48,39.37 1643.7,39.37 1761.81,39.37 2588.58,39.37 2706.69,39.37 933.35,54.72 846.46,59.06 1141.73,78.74 1250,78.74 -68.9,157.48 49.21,157.48 167.32,157.48 285.43,157.48 403.54,157.48 2529.53,157.48 2647.64,157.48 2765.75,157.48 2883.86,157.48 996.06,161.42 1584.65,255.91 -9.84,275.59 1289.37,275.59 1407.48,275.59 2234.25,275.59 2706.69,275.59 2824.8,275.59 2942.91,275.59 108.27,279.53 635.41,283.46 204.92,285.43 316.34,292.13 414.33,292.13 191.97,323.87 389.76,332.53 108.27,344.49 -68.9,393.7 49.21,393.7 1820.86,393.7 1988.19,393.7 2293.31,393.7 2411.42,393.7 2706.69,393.7 2883.86,393.7 1870.08,403.54 1948.82,403.54 2460.63,413.39 2519.68,413.39 2588.58,413.39 956.33,417.32 2169.29,429.13 1761.81,432.28 1801.18,433.07 2303.15,433.07 2559.06,444.88 2625.98,444.88 2805.12,462.6 2864.17,462.6 2913.39,462.6 2962.6,462.6 3011.81,462.6 2185.04,472.44 185.04,490.16 486.14,489.74 1739.96,497.64 2864.17,501.97 2913.39,501.97 2962.6,501.97 3011.81,501.97 -9.84,511.81 2805.12,511.81 303.15,532.68 433.07,537.4 2057.09,551.18 1739.96,571.12 176.41,574.07 27.56,590.55 452.76,590.55 2185.04,590.55 1917.32,601.13 226.38,609.88 -68.9,629.92 285.43,629.92 403.54,629.92 1230.31,629.92 1466.53,629.92 1584.64,629.92 1106.3,633.86 43.31,637.79 2470.47,639.76 2432.95,643.5 2507.99,643.5 2588.58,649.61 2637.8,649.61 2795.28,649.61 2864.17,649.61 2913.39,649.61 2962.6,649.61 3011.81,649.61 1210.63,659.45 433.07,669.29 264.73,688.6 816.93,688.98 2864.17,688.98 2913.39,688.98 2962.6,688.98 3011.81,688.98 316.34,692.91 1889.76,698.82 2175.2,698.82 2234.25,698.82 2293.31,698.82 2342.52,698.82 113.71,708.66 1023.62,708.66 816.93,728.35 984.25,738.19 -9.84,748.03 344.49,748.03 462.6,748.03 935.04,748.03 1210.63,748.03 1643.7,748.03 1998.03,748.03 2086.61,748.03 2175.2,748.03 2234.25,748.03 2352.36,748.03 2588.58,748.03 2706.69,748.03 2824.8,748.03 2942.91,748.03 252.55,751.19 1466.54,757.87 1584.65,757.87 2440.94,757.87 2470.47,757.87 2500,757.87 816.93,767.72 1417.32,777.56 1879.92,777.56 108.27,783.46 2007.87,787.4 2470.47,787.4 866.14,797.24 935.04,797.24 984.25,797.24 449.33,807.09 252.55,818.12 787.4,826.77 1417.32,826.77 1732.28,826.77 1771.65,826.77 2007.87,826.77 2047.24,826.77 1328.74,836.61 1594.49,836.61 1879.92,836.61 306.52,857.69 373.45,857.69 440.38,857.69 2007.87,866.14 2057.09,866.14 2175.2,866.14 2529.53,866.14 2647.64,866.14 2765.75,866.14 123.65,869.26 1022.29,874.02 1879.92,895.67 153.8,929.01 1840.55,944.88 1259.84,954.72 1328.74,954.72 1594.49,954.72 1938.98,954.72 2037.4,954.72 2135.83,954.72 2529.53,954.72 2627.95,954.72 2726.38,954.72 1368.11,964.57 1456.69,964.57 1525.59,964.57 1663.39,964.57 1722.44,964.57 1781.5,964.57 204.92,972.22 552.19,972.73 649.61,974.41 708.66,974.41 964.57,974.41 486.14,983.54 807.09,984.25 875.98,984.25 285.98,992.7 352.91,992.7 419.84,992.7 1407.48,1003.94
  other v2: 669.29,173.23 740.16,173.23 807.09,173.23 1003.94,320.25 909.45,393.7 881.89,405.51 909.45,425.2 673.23,468.5 696.85,468.5 673.23,492.13 696.85,492.13 645.67,696.85 645.67,732.28 645.67,767.72
NetC28_1: C28.1 R8.2 R46.2 | length 153.5
  Top Layer w39.37: 1634.08,895.67 C28.1@1693.13,895.67 ; R46.2@1665.35,893.7 C28.1@1696.85,893.7 ; R46.2@1665.35,893.7 C28.1@1696.85,893.7 ; R46.2@1665.35,893.7 C28.1@1696.85,893.7
NetC28_2: C28.2 IC8.1 | length 35.4
  Top Layer w39.37: C28.2@1779.53,893.7 IC8.1@1814.96,893.7
NetC31_2: C31.2 C32.2 C33.2 L8.2 L9.1 | length 360.4
  Top Layer w27.56: L8.2 1669.15,492.13 1669.15,562.99 1669.15,620.67 1669.15,669.15 1669.29,669.29 1669.29,708.66 1673.23,712.6 1724.41,712.6
NetC34_1: C34.1 R47.2 R49.1 | length 133.9
  Top Layer w29.92: R47.2 R49.1 C34.1
NetC34_2: C34.2 IC1.1 | length 139.6
  Top Layer w19.68: 1049.21,931.1 IC1.1@1090.55,931.1
  Top Layer w29.92: C34.2@956.69,917.32 975.96,917.32 989.74,931.1 1049.21,931.1
NetC39_1: C39.1 IC1.5 | length 113
  Top Layer w11.81: C39.1@1289.37,891.73 C39.1
  Top Layer w19.68: IC1.5@1181.1,893.7 C39.1
NetC39_2: C39.2 R8.1 R45.2 R50.2 | length 173.2
  Top Layer w66.93: C39.2@1370.08,893.7 1543.31,893.7
NetC40_1: C40.1 D2.2 IC8.3 L9.2 | length 175.2
  Top Layer w39.37: L9.2@1814.96,688.98 IC8.3@1814.96,767.72 ; C40.1@1816.93,608.27 L9.2@1816.93,704.72
NetC40_2: C40.2 C41.1 L10.2 R51.2
NetC41_2: C41.2 R57.1 R60.1 | length 90.6
  Top Layer w39.37: C41.2@2129.92,620.08 2129.92,645.67 R57.1@2194.88,645.67
NetC42_1: C42.1 R52.2 R56.1
NetC42_2: C42.2 IC1.3 | length 53.9
  Top Layer w19.68: 1047.24,830.71 1072.83,856.3 IC1.3@1090.55,856.3
NetC43_2: C43.2 C49.2 IC10.1 R55.1 | length 157.5
  Top Layer w31.5: C49.2 2374.02,496.06 R55.1 IC10.1@2413.39,570.87
NetC44_1: C44.1 R55.2 | length 118.1
  Top Layer w31.5: R55.2 C44.1
NetC44_2: C44.2 C50.1 IC10.3 L5.2 | length 189
  Top Layer w66.93: 2555.12,574.8 2594.49,574.8 2704.72,574.8 2744.09,574.8
NetC45_2: C45.2 C46.2 C47.2 L5.1 L11.1 | length 494.4
  Top Layer w27.56: L11.1@2559.45,255.76 2559.06,256.16 2559.06,342.52 C46.2 C45.2 2763.78,433.07 2700.79,433.07 L5.1@2700.79,482.28
NetC48_1: C48.1 IC12.1 | length 43.3
  Top Layer w11.81: 584.65,509.84 IC12.1@627.95,509.84
NetC48_2: C48.2 IC9.1 R58.2 R59.2
NetC49_1: C49.1 R57.2 R61.1 | length 149.6
  Top Layer w31.5: C49.1 R57.2
NetC50_2: C50.2 P2.1 | length 110.2
  Top Layer w66.93: C50.2@2850.39,574.8 P2.1
NetC56_1: C56.1 IC12.15 R65.2 R66.2 | length 795.5
  Top Layer w11.81: IC12.15@675.2,537.4 IC12.15 675.2,604.33 695.87,625 756.89,625 787.4,594.49 962.75,594.49 972.27,584.97 972.27,556.28 979.44,549.12 991.81,549.12 v2(992.84,550.15) v2@993.87,551.18 ; C56.1 1150.26,673.23 1165.35,658.13 R66.2 1159.84,630.32 1149.35,630.32 1127.95,608.92 1127.95,601.13 v2(1075.94,549.12)
  Bottom Layer w11.81: v2(992.84,550.15) 1074.91,550.15 v2(1075.94,549.12)
NetC57_2: C57.2 IC13.5 L12.1 | length 372.7
  Top Layer w7.87: C57.2 C57.2@933.63,117.72 ; 997.67,203.4 1036.39,242.13 1035.43,242.13
  Top Layer w15.75: L12.1@921.65,-0.14 960.43,-0.14 976.73,16.16 976.73,58.48 980.26,62.01 980.26,75.14 C57.2@933.35,122.05 ; 944.88,137.8 944.88,159.87 955.5,170.49 957.8,170.49 982.2,194.88 989.15,194.88 997.67,203.4 ; 1035.43,242.13 1049.21,255.91 IC13.5@1049.21,271.65
NetC58_2: C58.2 IC12.16 R69.2 R73.1 | length 597.9
  Top Layer w11.81: IC12.16@655.51,537.4 IC12.16 655.51,553.15 642.72,565.94 626.97,565.94 602.36,590.55 602.36,637.8 618.11,653.54 838.58,653.54 C58.2 ; C58.2@862.2,625.98 976.73,625.98 1012.17,590.55 1012.17,578.8 R69.2@1021.86,569.1
NetC59_2: C59.2 IC13.3 R74.1 | length 247.1
  Top Layer w7.87: 838.58,279.53 874.02,279.53 874.02,307.36 889.49,322.83 956.18,322.83 974.41,341.06 IC13.3@974.41,366.14
  Top Layer w11.81: C59.2@836.61,236.22 C59.2 836.61,277.56 838.58,279.53
  Top Layer w15.75: 838.3,279.53 838.58,279.53
NetC60_1: C60.1 R75.1 | length 133.9
  Top Layer w15.75: C60.1 492.13,370.08
NetC61_1: C61.1 IC12.9 | length 288.2
  Top Layer w11.81: C61.1 599.8,383.86 617.52,366.14 v2(649.61,366.14) ; IC12.9@742.13,450.79 773.62,450.79 771.65,448.82 v2(771.65,429.13)
  Bottom Layer w11.81: v2(649.61,366.14) 657.48,366.14 683.83,392.49 734.25,392.49 770.9,429.13 v2(771.65,429.13)
NetC61_2: C61.2 IC12.4 R75.2 | length 156.2
  Top Layer w11.81: R75.2 601.89,420.08 619.48,437.67 619.48,450.79 IC12.4 IC12.4@627.95,450.79
NetD3_3: D3.3 IC9.3 J1.1 | length 1054.9
  Top Layer w29.92: 447.03,925.2 512.3,925.2 513.48,924.02 IC9.3
  Top Layer w66.93: J1.1 127.59,413.39 89.68,451.29 89.68,558.02 94.49,562.83 94.49,590.55 185.04,681.1 185.04,825.2 cw(c285.04,825.2) 285.04,925.2 447.03,925.2
NetIC1_4: IC1.4 R44.1 | length 251
  Top Layer w11.81: IC1.4@1181.1,856.3 1257.87,856.3 1287.4,826.77 1287.4,803.15 1295.28,795.28 1342.52,795.28 1350.39,787.4 R44.1@1350.39,748.03
NetIC1_6: IC1.6 R43.1 | length 409.1
  Top Layer w11.81: IC1.6@1181.1,931.1 1151.57,931.1 1137.8,917.32 1137.8,842.52 1153.54,826.77 1232.28,826.77 1251.97,807.09 1251.97,700.79 R43.1@1287.4,665.35
NetIC9_4: IC9.4 R47.1 R48.1 | length 150.5
  Top Layer w29.92: IC9.4 813.78,924.02 R47.1
NetIC9_6: IC9.6 R53.2 R54.2
NetIC11_6: IC11.6 R62.1 | length 93.2
  Top Layer w15.75: R62.1 562.99,46.51 574.15,35.35 IC11.6 IC11.6@625.98,35.35
NetIC12_10: IC12.10 R74.2 | length 206.6
  Top Layer w11.81: IC12.10@742.13,470.47 803.23,470.47 838.68,435.02 838.68,342.61 838.58,342.52 836.61,344.49
NetIC12_12: IC12.12 R71.2 | length 138
  Top Layer w11.81: IC12.12@742.13,509.84 IC12.12 818.68,509.84 831.43,497.09 858.48,497.09 R71.2@870.08,485.49
NetIC12_13: IC12.13 R72.1 | length 173.3
  Top Layer w11.81: IC12.13@714.57,537.4 714.57,553.15 732.28,570.87 787.4,570.87 803.15,555.12 R72.1
NetIC12_14: IC12.14 R64.2 | length 384.6
  Top Layer w11.81: IC12.14@694.88,537.4 694.88,572.83 v2(712.6,590.55) ; R64.2@744.09,350.39 755.91,362.2 755.91,377.95 803.15,425.2 v2(814.96,425.2)
  Bottom Layer w11.81: v2(712.6,590.55) 724.41,578.74 740.16,578.74 787.4,531.5 787.4,456.69 v2@814.96,429.13
NetIC13_1: IC13.1 R67.1 R70.1 | length 371
  Top Layer w7.87: R67.1@905.51,185.04 921.02,200.55 921.83,200.55 927.65,206.37 927.65,207.18 947.5,227.02 991.42,227.02 1003.94,239.54 1003.94,259.45 1019.68,275.2 1019.68,303.77 1028.91,312.99 1033.13,312.99 1049.21,329.07 1049.21,366.14 1100.2,366.14 1118.11,348.23 R70.1
NetIC13_4: IC13.4 R67.2 R68.2 | length 117.6
  Top Layer w15.75: 905.51,236.22 905.51,275.59 909.45,279.53 962.6,279.53 IC13.4@976.38,265.75
NetJ3_1: J3.1 R50.1 | length 81.7
  Top Layer w39.37: R50.1 1500,814.96 cw(c1500,787.4) 1527.56,787.4 ; J3.1 J3.1@1527.56,779.53
NetJ4_1: J4.1 R51.1
NetP7_5: P7.5 R70.2 | length 332.3
  Top Layer w15.75: R70.2 1118.11,256.69 1090.55,229.13 1090.55,72.75 1142.91,20.39 P7.5
P3V3A: C51.1 IC11.4 L12.2 R62.2 R63.1 | length 786.9
  Top Layer w15.75: 562.99,122.05 564.96,124.02 610.15,124.02 IC11.4 ; 562.99,173.23 562.99,124.02 494.09,124.02 C51.1 456.69,122.05 440.94,106.3 440.94,1.26 464.29,-22.09 835.93,-22.09 L12.2@857.87,-0.14
P3V3ADL: C53.2 C54.2 C55.2 IC12.5 IC12.7 R63.2 R64.1 | length 547.7
  Top Layer w11.81: IC12.5@655.51,423.23 655.51,395.67 661.42,389.76 675.2,389.76 ; 677.17,236.22 675.2,238.19 675.2,389.76 ; IC12.7@694.88,423.23 694.88,395.67 688.98,389.76 675.2,389.76 ; 740.16,236.22 740.16,267.72 755.91,283.46 R64.1@755.91,311.02
  Top Layer w15.75: 562.99,236.22 C53.2 677.17,236.22 C54.2 740.16,236.22 C55.2@775.59,236.22
SW_RF_A: P8.8 R44.2 | length 588.8
  Top Layer w11.81: R44.2@1350.39,665.35 1385.83,665.35 1405.51,645.67 1405.51,600.06 1469.29,536.28 1469.29,298.43 1495.67,272.05 P8.8
SW_RF_B: P8.7 R43.2 | length 941.9
  Top Layer w11.81: R43.2@1283.46,732.28 R43.2 1297.24,722.44 1297.24,718.41 1314.87,700.79 1389.76,700.79 1429.13,661.42 1429.13,609.84 1495.67,543.31 1495.67,342.52 1539.37,298.82 1539.37,35.43 1495.67,-8.27 P8.7
VCC_PREAMP: L8.1 L11.2 P8.2 | length 1144.7
  Top Layer w27.56: L8.1@1669.15,338.72 1704.72,303.15 1759.84,303.15 1783.86,279.13 1783.86,157.48 1783.86,78.35 1807.09,55.12 2094.49,55.12 2295.13,255.76 L11.2@2495.67,255.76
VCC_PREAMP_1: C18.2 C52.2 IC11.3 IC11.5 P7.8 | length 750.9
  Top Layer w8: 886.51,42.57 889.76,39.32 889.76,-24.56 900.64,-35.43